# Altium PCB Stlink v2.PcbDoc
Units mm, origin at the board's own origin, x right, y up, seen from the top; angles counter-clockwise.
Board outline 51.9 x 28.6 mm, 2 copper layers (Top Layer, Bottom Layer); 33 components, 46 nets, 158 pads, 24 vias.
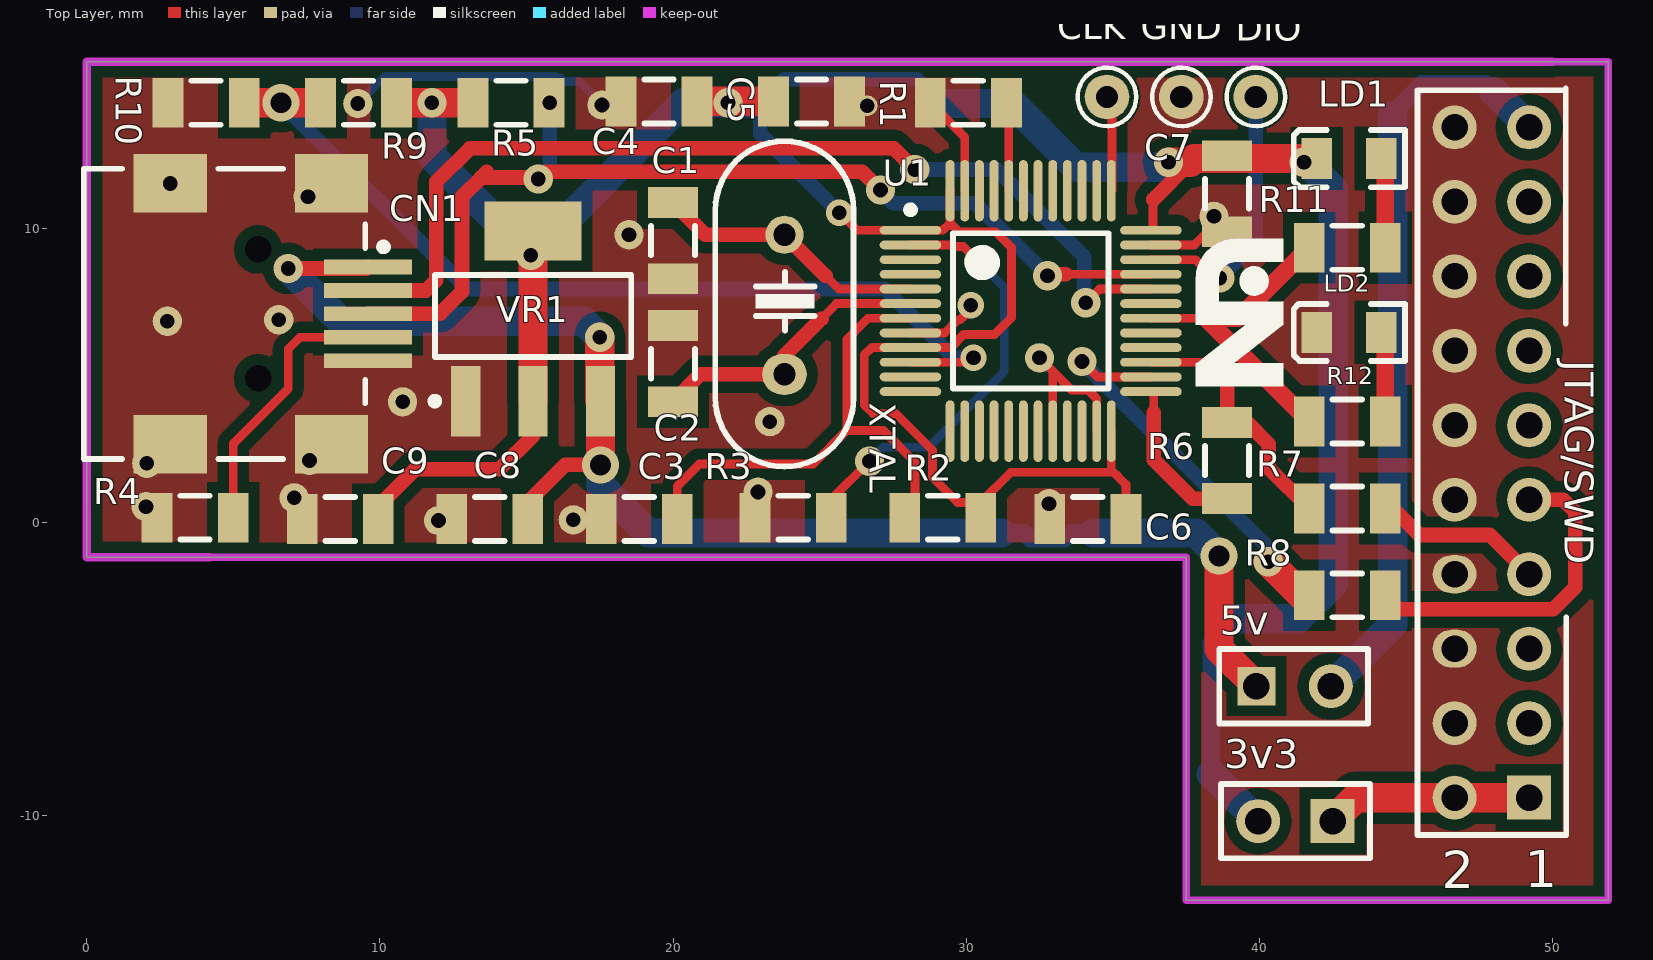
[diagram p0: Top Layer view]
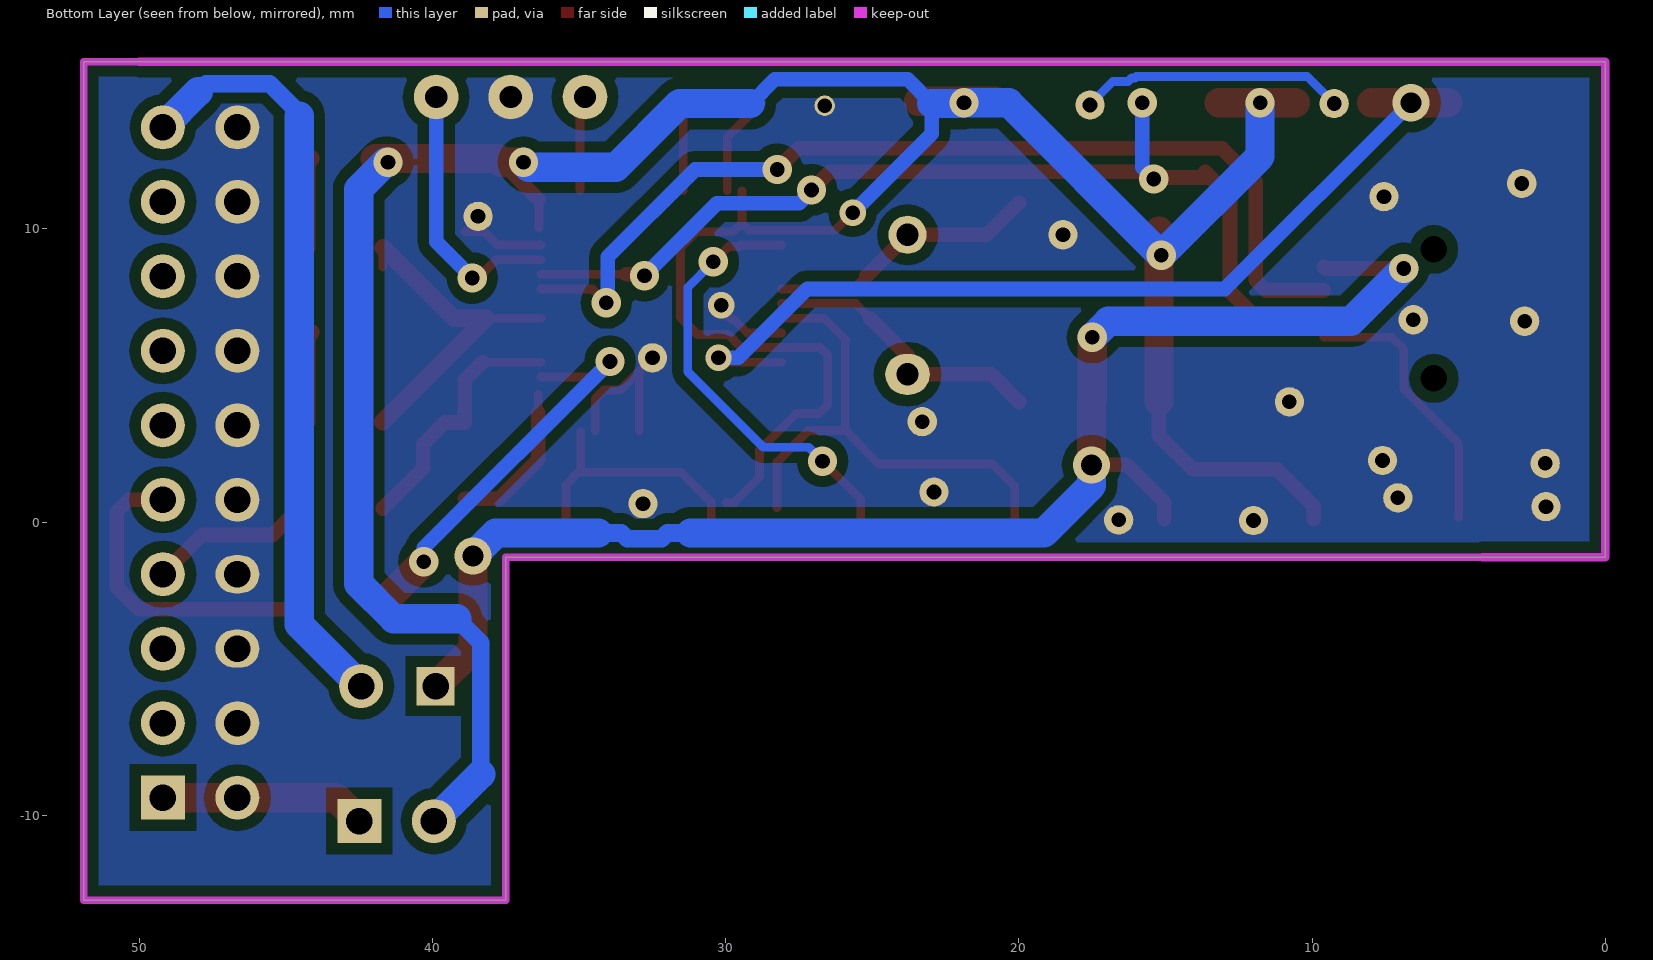
[diagram p1: Bottom Layer view, seen from below]
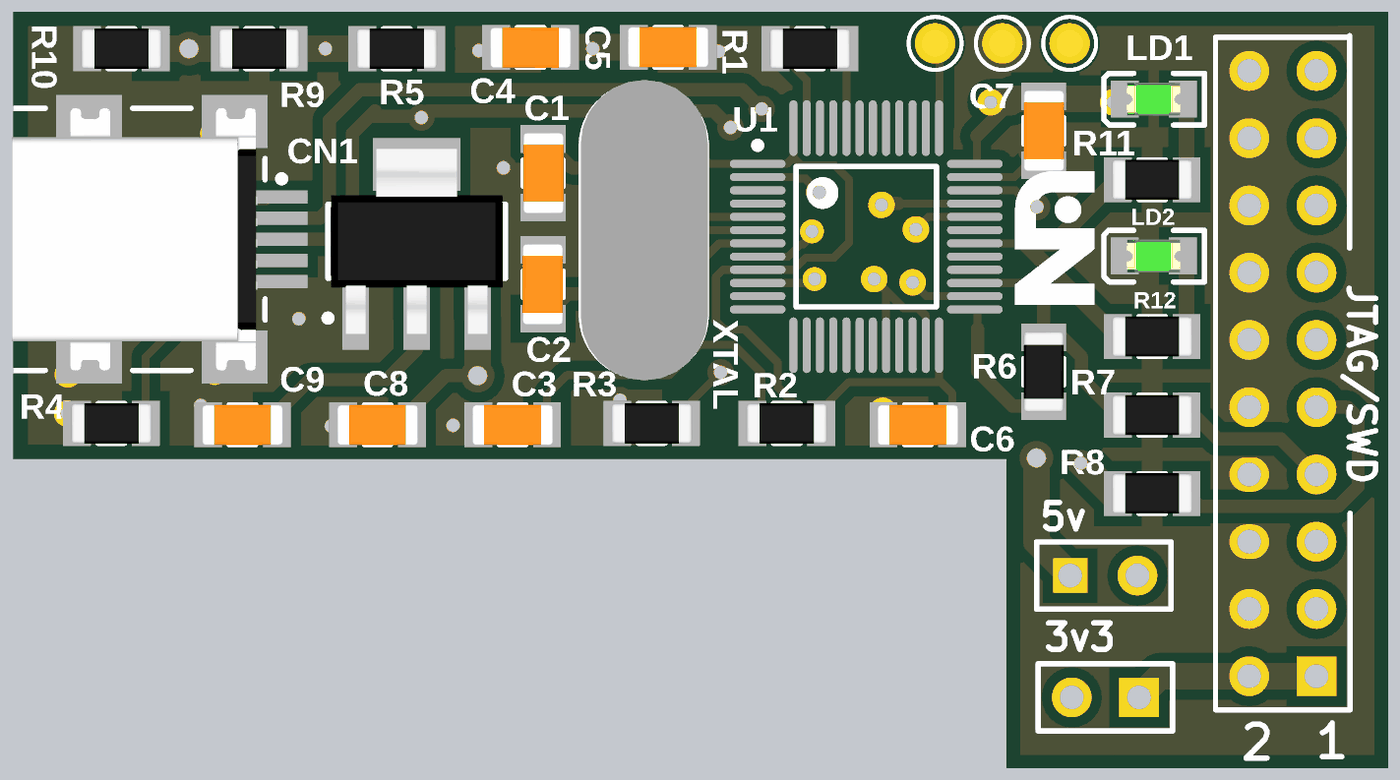
[diagram p2: 3D render of the assembled board from above, using the file's embedded part models]

## Layer stack, top to bottom
Top Layer: signal copper 0.0356
Dielectric: dielectric 0.32, FR-4, Dk 4.8
Bottom Layer: signal copper 0.0356

## Board outline
0,15.7 51.9,15.7 51.9,-12.9 37.5,-12.9 37.5,-1.2 0,-1.2

## Design rules (kind name [scope] priority, off if disabled: settings)
Clearance Poly [(inpoly)] p1: gap=0.381
Clearance [All] p2: gap=0.2
FabricationTestpoint [(IsPad And (OnTopLayer Or OnBottomLayer))] p1: side=3 testpointundercomponent=TRUE minsize=1.016 maxsize=2.54 preferedsize=1.524 minholesize=0 maxholesize=1.016 preferedholesize=0.813 testpointgrid=0.025 allowsidetop=TRUE allowsidebottom=TRUE usegrid=TRUE gridtolerance=0
MinimumSolderMaskSliver [All] p1: minsoldermaskwidth=0
PlaneConnect [All] p1: planeconnectstyle=Direct reliefexpansion=0.508 reliefentries=4 reliefconductorwidth=0.254 reliefairgap=0.254
PolygonConnect [All] p1: connectstyle=Direct reliefconductorwidth=0.254 reliefentries=4 polygonreliefangle="90 Angle"
RoutingVias [All] p1: holewidth=0.711 width=1.27 viastyle="Through Hole" minholewidth=0.5 minwidth=0.9 maxholewidth=0.711 maxwidth=1.27
SilkToSilkClearance [All] p1: silktosilkclearance=0
SilkscreenOverComponentPads SilkToSolderMaskClearance [IsPad] p1: minsilkscreentomaskgap=0
SolderMaskExpansion [All] p1: expansion=0
Width [All] p1: maxlimit=5 minlimit=0.25 preferedwidth=0.25 minimp=50.000000 maximp=50.000000 favimp=50.000000
23 further rules are at their usual default settings.

## Components (designator, comment, footprint, x,y, rotation, side; value= is the part's Value field where it differs from the comment)
3v3 "Header 2" HDR1X2#1 42.5,-10.2 r180 top (schematic designator k2)
5v "Header 2" HDR1X2#2 39.9,-5.6 r0 top (schematic designator k1)
C1 "Capacitor SMD" SMD_CAP_1206 20,8.3 r90 top
C2 "Capacitor SMD" SMD_CAP_1206 20,6.7 r270 top
C3 "Capacitor SMD" SMD_CAP_1206 17.55,0.1 r0 top
C4 "Capacitor SMD" SMD_CAP_1206 18.225,14.348 r0 top
C5 "Capacitor SMD" SMD_CAP_1206 26.021,14.348 r180 top
C6 "Capacitor SMD" SMD_CAP_1206 32.85,0.1 r0 top
C7 "Capacitor SMD" SMD_CAP_1206 38.9,9.9 r90 top
C8 "Capacitor SMD" SMD_CAP_1206 12.45,0.1 r0 top
C9 "Capacitor SMD" SMD_CAP_1206 7.35,0.1 r0 top
CLK "Description" "Test Point Small" 34.8,14.5 r0 top
CN1 "USB mini" USB/SM0.8-6H5 0.6,7.1 r180 top
DIO "Description" "Test Point Small" 39.88,14.5 r0 top
GND "Description" "Test Point Small" 37.34,14.5 r0 top
JTAG/SWD "Header 10X2" HDR2X10 49.2,-9.4 r90 top (schematic designator P?)
LD1 "Grn" "LED_0805 GRE" 43.058,12.4 r180 top
LD2 "Red" "LED_0805 GRE" 43.058,6.473 r180 top
R1 "Resistor SMD" SMD_RES_1206 28.775,14.3 r0 top
R2 "Resistor SMD" SMD_RES_1206 30.496,0.148 r180 top
R3 "Resistor SMD" SMD_RES_1206 25.396,0.148 r180 top
R4 "Resistor SMD" SMD_RES_1206 2.4,0.148 r0 top
R5 "Resistor SMD" SMD_RES_1206 13.175,14.3 r0 top
R6 "Resistor SMD" SMD_RES_1206 38.9,0.8 r90 top
R7 "Resistor SMD" SMD_RES_1206 41.7,0.464 r0 top
R8 "Resistor SMD" SMD_RES_1206 41.7,-2.5 r0 top
R9 "Resistor SMD" SMD_RES_1206 10.571,14.3 r180 top
R10 "Resistor SMD" SMD_RES_1206 2.775,14.3 r0 top
R11 "Resistor SMD" SMD_RES_1206 41.7,9.354 r0 top
R12 "Resistor SMD" SMD_RES_1206 41.7,3.427 r0 top
U1 "STM32F103C8T6" LQFP48_M 32.2,7.2 r0 top
VR1 "AMS1117-3V3" MP04A_N 15.225,7.025 r90 top
XTAL "8MHz" XTAL 23.8,9.8 r270 top (schematic designator Y1)

## Footprints (in the part's own frame and the unit in brackets; to place one, negate y for a bottom-side part, rotate by r counter-clockwise, add the part's x,y. Pads: shape width x height; smd on the part's side, far side on the other; paste and mask are expansions set on the pad)
HDR1X2#1 [mm] "Connector; Header; 2 Position"
  rect 1.5x1.5 hole 0.9: 1(0,0)
  round 1.5 hole 0.9: 2(2.54,0)
  silkscreen extent -1.27,-1.27 3.81,1.27
HDR1X2#2 [mm] "Connector; Header; 2 Position"
  rect 1.3x1.3 hole 0.9: 1(0,0)
  round 1.5 hole 0.9: 2(2.54,0)
  silkscreen extent -1.27,-1.27 3.81,1.27
HDR2X10 [mm] "Connector; Header; 10x2 Position"
  rect 1.5x1.5 hole 0.9: 1(0,0)
  round 1.5 hole 0.9: 2(0,2.54) 3(2.54,0) 4(2.54,2.54) 5(5.08,0) 7(7.62,0) 9(10.16,0) 10(10.16,2.54) 11(12.7,0) 12(12.7,2.54) 13(15.24,0) 14(15.24,2.54) 15(17.78,0) 16(17.78,2.54) 17(20.32,0) 18(20.32,2.54) 19(22.86,0) 20(22.86,2.54)
  oval 1.3x1.5 hole 0.9: 6(5.08,2.54) 8(7.62,2.54)
  silkscreen extent -1.27,-1.27 24.19,3.81
"LED_0805 GRE" [mm]
  rect 1.05x1.4 smd: 1(-1.1,0) 2(1.1,0)
  silkscreen extent -1.91,-0.97 1.89,0.98, body extent -1,-0.62 1.02,0.63, height 1.1
LQFP48_M [mm] "Thin QFP, 48-Leads, Body 7x7mm, Pitch 0.5mm, IPC Low Density"
  oval 2.1x0.3 smd: 1(-4.1,2.75) 2(-4.1,2.25) 3(-4.1,1.75) 4(-4.1,1.25) 5(-4.1,0.75) 6(-4.1,0.25) 7(-4.1,-0.25) 8(-4.1,-0.75) 9(-4.1,-1.25) 10(-4.1,-1.75) 11(-4.1,-2.25) 12(-4.1,-2.75) 25(4.1,-2.75) 26(4.1,-2.25) 27(4.1,-1.75) 28(4.1,-1.25) 29(4.1,-0.75) 30(4.1,-0.25) 31(4.1,0.25) 32(4.1,0.75) 33(4.1,1.25) 34(4.1,1.75) 35(4.1,2.25) 36(4.1,2.75)
  oval 0.3x2.1 smd: 13(-2.75,-4.1) 14(-2.25,-4.1) 15(-1.75,-4.1) 16(-1.25,-4.1) 17(-0.75,-4.1) 18(-0.25,-4.1) 19(0.25,-4.1) 20(0.75,-4.1) 21(1.25,-4.1) 22(1.75,-4.1) 23(2.25,-4.1) 24(2.75,-4.1) 37(2.75,4.1) 38(2.25,4.1) 39(1.75,4.1) 40(1.25,4.1) 41(0.75,4.1) 42(0.25,4.1) 43(-0.25,4.1) 44(-0.75,4.1) 45(-1.25,4.1) 46(-1.75,4.1) 47(-2.25,4.1) 48(-2.75,4.1)
  silkscreen extent -4.22,-2.65 2.65,3.57, body extent -3.5,-3.5 3.5,3.5, height 1.6
MP04A_N [mm] "SOT223, 4-Leads, Body 6.5x3.5mm, Pitch 2.3mm, Lead Span 7mm, IPC Medium Density"
  rect 2.4x1 smd: 1(-2.9,2.3) 2(-2.9,0) 3(-2.9,-2.3)
  rect 2x3.3 smd: 4(2.9,0)
  silkscreen extent -3.02,-3.35 1.4,3.47, body extent -3.49,-3.24 3.49,3.24, height 1.64
SMD_CAP_1206 [mm]
  rect 1.05x1.7 smd: 1(0,0) 2(2.596,0)
  silkscreen extent 0.8,-0.75 1.8,0.75, body extent -0.22,-0.77 2.82,0.75, height 0.75
SMD_RES_1206 [mm] "Chip Resistor, 2-Leads, Body 3.2x1.6mm, IPC High Density _ (0.125 W)"
  rect 1.05x1.7 smd: 1(0,0) 2(2.596,0)
  silkscreen extent 0.8,-0.75 1.8,0.75, body extent -0.23,-0.76 2.82,0.76, height 0.6
"Test Point Small" [mil]
  round 60 hole 30: 1(0,0)
  silkscreen extent -39,-39 39,39, body extent -20,-20 20,20, height 256
USB/SM0.8-6H5 [mm] "Connector; USB2.0, Type B, SM; 5 Position; Right Angle"
  rect 3x0.5 smd: 1(-9,-1.6) 2(-9,-0.8) 3(-9,0) 4(-9,0.8) 5(-9,1.6)
  rect 2.5x2 smd: 6(-7.75,4.45) 7(-2.25,4.45) 8(-7.75,-4.45) 9(-2.25,-4.45)
  round 0.6 hole 0.9 unplated: MH1(-5.25,2.2) MH2(-5.25,-2.2)
  silkscreen extent -9.65,-4.95 0.7,4.95, body extent -8.6,-4.95 0.65,4.95, height 3.93
XTAL [mil]
  round 51.18 hole 30: 1(0,0)
  oval 55x60 hole 30: 2(187.4,0)
  silkscreen extent -126,-93 311,93, body extent -131,-94 316,95, height 514

## Part data
3v3 5v: "Header, 2-Pin"
CLK DIO GND: library part "Test Point", "Test Point"
CN1: "mini USB Connector"
JTAG/SWD: "Header, 10-Pin, Dual row"
LD1 LD2: library part "LED SMD"
U1: "STM32 ARM-based 32-bit MCU with 64 Kbytes Flash, 48-pin LQFP, Industrial Temperature"
VR1: library part LM1117IMP-x.x, "x.x Volt, 800mA Low-Dropout Linear Regulator, 4-pin SOT-223"
XTAL: library part XTAL, "XTAL Crystal"

## Free pads (board coordinates)
  round 1 hole 0.5: 0(7.6,2.1) 1(7.075,0.825) 2(2.05,2) 3(2.025,0.525) 4(2.75,6.85) 5(2.85,11.55) 6(7.55,11.1) 7(32.5,5.6) 10(16.6,0.075) 11(12,0.05) 12(23.3,3.425) 13(32.825,0.625) 14(22.9,1.025) 15(6.55,6.9) 17(10.775,4.1) 18(38.45,10.425) 19(17.575,14.225) 20(18.5,9.8) 22(9.25,14.275)
  round 0.7 hole 0.5: 21(26.625,14.2)

## Via types
v1: diameter 1, hole 0.5, Top Layer to Bottom Layer, 10 vias
v2: diameter 1, hole 0.5, Top Layer to Bottom Layer, tented both sides, 8 vias
v3: diameter 0.9, hole 0.5, Top Layer to Bottom Layer, 3 vias
v4: diameter 1.27, hole 0.711, Top Layer to Bottom Layer, tented both sides, 3 vias

## Nets (pads, with @x,y where several pads share a name; then routed paths per layer and width w, separated by ;. In a path a pad name is that pad's centre, name@x,y a point inside that pad or via, vN(x,y) a via of type N, cw(c..) or ccw(c..) an arc to the next point about the centre after c; other vN are vias at no path point)
3V3: 3v3.2 C4.2 C5.2 C6.2 C7.2 C9.2 LD1.2 R2.1 R5.1 R9.1 U1.1 U1.9 U1.24 U1.36 U1.48 VR1.2 VR1.4 | length 122
  Top Layer w0.3: v3(25.675,10.55) 26.275,9.95 U1.1 29.2,9.95 29.45,10.2 ; U1.48 29.45,10.2 ; R2.1@29.975,0.67 29.705,0.67 28.85,1.525 28.85,2.45 27.6,3.7 26.825,3.7 26.525,4 26.525,5.7 26.775,5.95 U1.9 29.469,5.95 29.919,6.4 30.975,6.4 31.55,6.975 31.55,9.35 31,9.9 29.743,9.9 29.45,10.193 29.45,10.2 ; R2.1 30.496,0.67 31.527,1.7 35.025,1.7 35.446,1.279 C6.2 ; U1.24 34.95,1.775 35.201,1.524 ; U1.36@36.375,10.025 36.375,11
  Top Layer w0.5: C9.2 9.946,0.546 11.2,1.8 14.075,1.8 15.225,2.95 VR1.2 ; 36.375,11 37.65,12.275 37.775,12.4
  Top Layer w1: R9.1 v2(11.776,14.3) R5.1 ; VR1.2 VR1.4 ; C4.2 C5.2 ; v1(36.9,12.275) 37.65,12.275 ; 37.775,12.4 LD1.2
  Bottom Layer w0.5: v3(25.675,10.55) 22.975,13.25 22.975,14.275 23.8,15.1 28.331,15.1 29.156,14.275
  Bottom Layer w0.6: 38.36,-8.6 38.36,-4.115 39.175,-3.3
  Bottom Layer w1: v2(11.776,14.3) 11.776,12.474 v1(15.15,9.1) 20.35,14.3 v2(21.875,14.3) 21.9,14.275 22.975,14.275 ; 29.156,14.275 31.575,14.275 33.75,12.1 36.725,12.1 v1(36.9,12.275) ; 38.36,-8.6 3v3.2 ; 39.175,-3.3 41.325,-3.3 42.525,-2.1 42.525,11.35 41.6,12.275 v1(41.525,12.275)
5V: 5v.1 C8.2 CN1.1 VR1.3 | length 51.1
  Top Layer w0.5: v1(6.875,8.65) 9.55,8.65 CN1.1 ; C8.2 15.046,0.671 16.325,1.95 v4(17.525,1.95)
  Top Layer w1: VR1.3@17.5,4.15 v1(17.5,6.3) ; v4(17.525,1.95) VR1.3 VR1.3@17.525,3.25 ; v4(38.625,-1.155) 38.625,-4.325 5v.1
  Bottom Layer w0.6: 31.2,-0.373 31.988,-0.373 32.186,-0.571 33.364,-0.571 33.563,-0.373 34.35,-0.373
  Bottom Layer w1: v1(6.875,8.65) 8.675,6.85 16.95,6.85 v1(17.5,6.3) ; v4(17.525,1.95) 17.525,1.25 19.148,-0.373 31.2,-0.373 ; 34.35,-0.373 37.843,-0.373 v4(38.625,-1.155)
BOOT0: R1.2 U1.44 | length 2.9
  Top Layer w0.3: U1.44 R1.2@31.45,14.221
GND: C1.1 C2.1 C3.1 C4.1 C5.1 C6.1 C7.1 C8.1 C9.1 CN1.5 CN1.6 CN1.7 CN1.8 CN1.9 GND.1 JTAG/SWD.4 JTAG/SWD.6 JTAG/SWD.8 JTAG/SWD.10 JTAG/SWD.12 JTAG/SWD.14 JTAG/SWD.16 JTAG/SWD.18 JTAG/SWD.20 LD2.2 pad.0 pad.1 pad.2 pad.3 pad.4 pad.5 pad.6 pad.7 pad.10 pad.11 pad.12 pad.13 pad.14 pad.15 pad.17 pad.18 pad.19 pad.20 pad.21 pad.22 R1.1 R3.2 R4.1 R10.1 U1.8 U1.20 U1.23 U1.35 U1.47 VR1.1 | length 23.6
  Top Layer w0.3: U1.8 29.262,6.45 29.712,6.9 29.8,6.9 30.15,7.25 v3(30.15,7.4) ; R1.1 29.95,13.125 U1.47 ; pad.7 32.95,5.15 ; U1.20 32.95,5.15 ; U1.23 34.45,4.207 34.157,4.5 33.6,4.5 32.95,5.15 ; U1.35 37.784,9.45 38.234,9.9 C7.1
  Bottom Layer w0.3: pad.22 10.175,15.2 15.989,15.2 16.039,15.15 16.152,15.15 16.277,15.025 16.8,15.025 17.575,14.25 pad.19
ID: CN1.4 R4.2 | length 9.4
  Top Layer w0.3: R4.2 4.996,2.671 6.875,4.55 6.875,5.9 7.275,6.3 CN1.4
LED_STLINK: R11.1 R12.1 U1.30 | length 12
  Top Layer w0.3: U1.30 38.177,6.95 ; R11.1@41.679,9.354 R11.1 R11.1@41.7,8.7
  Top Layer w0.6: R11.1@41.679,9.354 39.275,6.95 38.177,6.95 R12.1
Netk1_2: 5v.2 JTAG/SWD.19 | length 26
  Bottom Layer w0.6: 44.55,13.95 45.55,14.95 47.725,14.95 48,14.675
  Bottom Layer w1: 5v.2 44.55,-3.49 44.55,13.85 ; 48,14.675 49.2,13.475 JTAG/SWD.19
Netk2_1: 3v3.1 JTAG/SWD.1 JTAG/SWD.2 | length 7
  Top Layer w1: 3v3.1 43.3,-9.4 JTAG/SWD.2 JTAG/SWD.1
NetLD1_1: LD1.1 R11.2 | length 3.1
  Top Layer w0.6: LD1.1 44.296,12.262 R11.2
NetLD2_1: LD2.1 R12.2 | length 3.1
  Top Layer w0.6: LD2.1 44.296,6.335 R12.2
NetR3_1: R3.1 U1.2 | length 15
  Top Layer w0.3: R3.1 25.396,0.771 v2(26.7,2.075) ; U1.2 29.486,9.45 29.536,9.4 29.9,9.4 v1(30.425,8.875)
  Bottom Layer w0.3: v2(26.7,2.075) 27.175,2.55 28.725,2.55 31.3,5.125 31.3,8 v1(30.425,8.875)
OSC_IN: C1.2 U1.5 XTAL.1 | length 9.3
  Top Layer w0.3: 25.2,8.4 25.65,7.95 U1.5
  Top Layer w0.5: C1.2 21.096,9.8 XTAL.1 25.2,8.4
OSC_OUT: C2.2 U1.6 XTAL.2 | length 9.9
  Top Layer w0.3: 25.063,6.937 25.575,7.45 U1.6
  Top Layer w0.5: C2.2 20.936,5.04 XTAL.2 23.8,5.675 25.063,6.937
PA0: R9.2 R10.2 U1.10 | length 32
  Top Layer w0.3: U1.10 30.1,5.45 v3(30.25,5.6)
  Top Layer w1: R10.2 v4(6.625,14.3) R9.2
  Bottom Layer w0.5: v4(6.625,14.3) 12.975,7.95 27.225,7.95 29.575,5.6 v3(30.25,5.6)
PA1: U1.11
PA2: U1.12
PA3: U1.13
PA4: U1.14
PA5: U1.15
PA6: U1.16
PA7: U1.17
PA8: U1.29
PA10: U1.31
PA11: CN1.2 U1.32 | length 34
  Top Layer w0.3: v1(34.075,7.475) 34.55,7.95 U1.32
  Top Layer w0.5: CN1.2 11.575,7.9 11.925,8.25 11.925,11.6 13.075,12.75 27.525,12.75 v2(28.25,12.025)
  Bottom Layer w0.5: v2(28.25,12.025) 31.05,12.025 34.025,9.05 34.025,7.475 v1(34.075,7.475)
PA12: CN1.3 R5.2 U1.33 | length 35.2
  Top Layer w0.3: 33.4,8.45 U1.33
  Top Layer w0.5: CN1.3 12.05,7.1 12.8,7.85 12.8,11.1 13.451,11.751 ; 13.65,11.95 13.451,11.751 ; v2(27.075,11.325) 26.45,11.95 15.65,11.95 v2(15.4,11.7) 15.349,11.751 13.451,11.751 ; v1(32.775,8.4) 32.825,8.45 33.4,8.45
  Bottom Layer w0.5: v2(15.4,11.7) 15.8,12.1 v1(15.8,14.3) ; v2(27.075,11.325) 27.075,11.3 27.5,10.875 30.3,10.875 v1(32.775,8.4)
PA13: DIO.1 U1.34 | length 9.3
  Top Layer w0.3: U1.34 37.825,8.95 38.475,8.3 38.65,8.3 v2(38.65,8.325)
  Bottom Layer w0.5: v2(38.65,8.325) 39.88,9.555 DIO.1
PA14: CLK.1 U1.37 | length 3.2
  Top Layer w0.3: CLK.1 34.975,14.325 U1.37@34.975,11.325
PA15: U1.38
PB0: U1.18
PB1: U1.19
PB3: U1.39
PB4: U1.40
PB5: U1.41
PB6: U1.42
PB7: U1.43
PB8: U1.45
PB9: U1.46
PB10: U1.21
PB11: U1.22
PB12: R6.1 U1.25 | length 5.3
  Top Layer w0.3: 36.4,3.725 U1.25@36.4,4.35
  Top Layer w0.5: 36.4,3.725 36.4,2.125 37.725,0.8 R6.1
PB13: R8.1 U1.26 | length 13.6
  Top Layer w0.3: v1(33.95,5.475) 34.475,4.95 U1.26
  Top Layer w1: v2(40.3,-1.35) R8.1@41.45,-2.5
  Bottom Layer w0.5: v1(33.95,5.475) 40.3,-0.875 v2(40.3,-1.35)
PB14: R6.2 R7.1 U1.27 | length 8.8
  Top Layer w0.3: U1.27 38.3,5.45
  Top Layer w0.5: 38.3,5.45 38.9,4.85 R6.2 39.579,3.396 40.325,2.65 40.325,1.839 R7.1
PB15: U1.28
RESET: C3.2 R2.2 U1.7 | length 17.6
  Top Layer w0.3: C3.2 20.146,1.221 20.9,1.975 24.775,1.975 25.925,3.125 ; U1.7 26.65,6.95 25.925,6.225 25.925,3.125 ; R2.2@28.25,0.498 28.25,2.05 27.175,3.125 25.925,3.125
TCK(SWCLK): JTAG/SWD.9 R8.2 | length 11.3
  Top Layer w0.5: R8.2 44.776,-2.98 50.02,-2.98 50.775,-2.225 50.775,0.35 50.365,0.76 JTAG/SWD.9
TMS(SWDIO): JTAG/SWD.7 R7.2 | length 5.8
  Top Layer w0.5: R7.2 44.556,0.464 45.46,-0.44 47.86,-0.44 JTAG/SWD.7
pads on no net: CN1.MH1 CN1.MH2 JTAG/SWD.3 JTAG/SWD.5 JTAG/SWD.11 JTAG/SWD.13 JTAG/SWD.15 JTAG/SWD.17 U1.3 U1.4

## Polygon pours and split planes (outlines as drawn)
GND on Top Layer "Bottom Layer-No Net" (solid, remove dead copper, pour order 1000): 0,15.7 51.9,15.7 51.9,-12.9 37.5,-12.9 37.5,-1.2 0,-1.2
GND on Bottom Layer "Bottom Layer-No Net" (solid, remove dead copper, pour order 1001): 0,15.7 51.9,15.7 51.9,-12.9 37.5,-12.9 37.5,-1.2 0,-1.2

## Keep-outs
Keep-Out Layer:
  lines w0.254: 4.2,-1.2 37.5,-1.2 37.5,-12.9 51.9,-12.9 51.9,15.7 ; 49.6,15.7 51.9,15.7 ; 51.9,15.7 51.9,15.7
  lines w0.3: 4.2,-1.2 0,-1.2 0,15.7 50,15.7

## Silkscreen, mask and mechanical layers (free items; w line width, h text height)
Top Overlay:
  circle w0.5: c39.818,8.223 r0.255
  region: 40.818,4.623 40.818,5.423 37.818,5.423 37.818,4.623
  region: 40.818,6.723 40.818,7.523 37.818,7.523 37.818,6.723
  region: 40.836,6.739 40.344,7.37 37.853,5.424 38.345,4.794
  region: 40.818,8.873 40.818,9.673 39.218,9.673 39.218,8.873
  region: 38.618,8.273 37.818,8.273 37.818,6.723 38.618,6.723
  lines w0.8: 38.218,8.273 cw(c39.218,8.273) 39.218,9.273

## Text inside footprints (layer, text, board x,y; h text height)
CN1: Mechanical 1 "PCB Edge" at 0.168,11.136 h0.25 r270
JTAG/SWD: Top Overlay "2" at 46.225,-12.5 h1.27; Top Overlay "1" at 49.05,-12.45 h1.27